# EAGLE board testBoard (EAGLE 8.6.0)

Size 30.53 x 30.47 mm. Coordinates in mm from the lower left corner, seen from the top.
Outline: 0,0 30.53,0 30.53,30.47 0,30.47 0,0
Copper layers (1*16): Top 0.035mm / dielectric 1.5mm / Bottom 0.035mm
Design rules "default": minimum track width 6mil, minimum drill 0.35mm, track to track 6mil, track to pad 6mil, pad to pad 6mil, via to via 6mil, smd to smd 6mil, copper to edge 40mil, drill to drill 6mil, minimum pad ring 10mil, minimum via ring 8mil, stop-mask expansion 4mil, vias tented up to drill 0mil, thermal gap 10mil

## Footprints (pad centres in the part's own frame; a part is rotated, then mirrored left to right if it is on the bottom)
A5F083 = drill 2.54 pad 3.81 square: P$1 -8.89,0 | drill 2.54 pad 3.81 octagon: P$2 8.89,0 | hole 6.604: 0,0

## Placement (x,y rotation side)
U$1  AIYIMA-PUMP-A5F083  [A5F083]  15.24,15.24 0 top

## Library data of the parts
U$1 = programmable-air-components